# Altium PCB tmtr_board_rev1.PcbDoc
Units mil, origin at the board's own origin, x right, y up, seen from the top; angles counter-clockwise.
Board outline 1456.69 x 1811.02 mil, 2 copper layers (Top, Bottom), stack 61.811 mil thick; 40 components, 41 nets, 149 pads, 25 vias.
Unrouted connection lines stored in the file: 1.
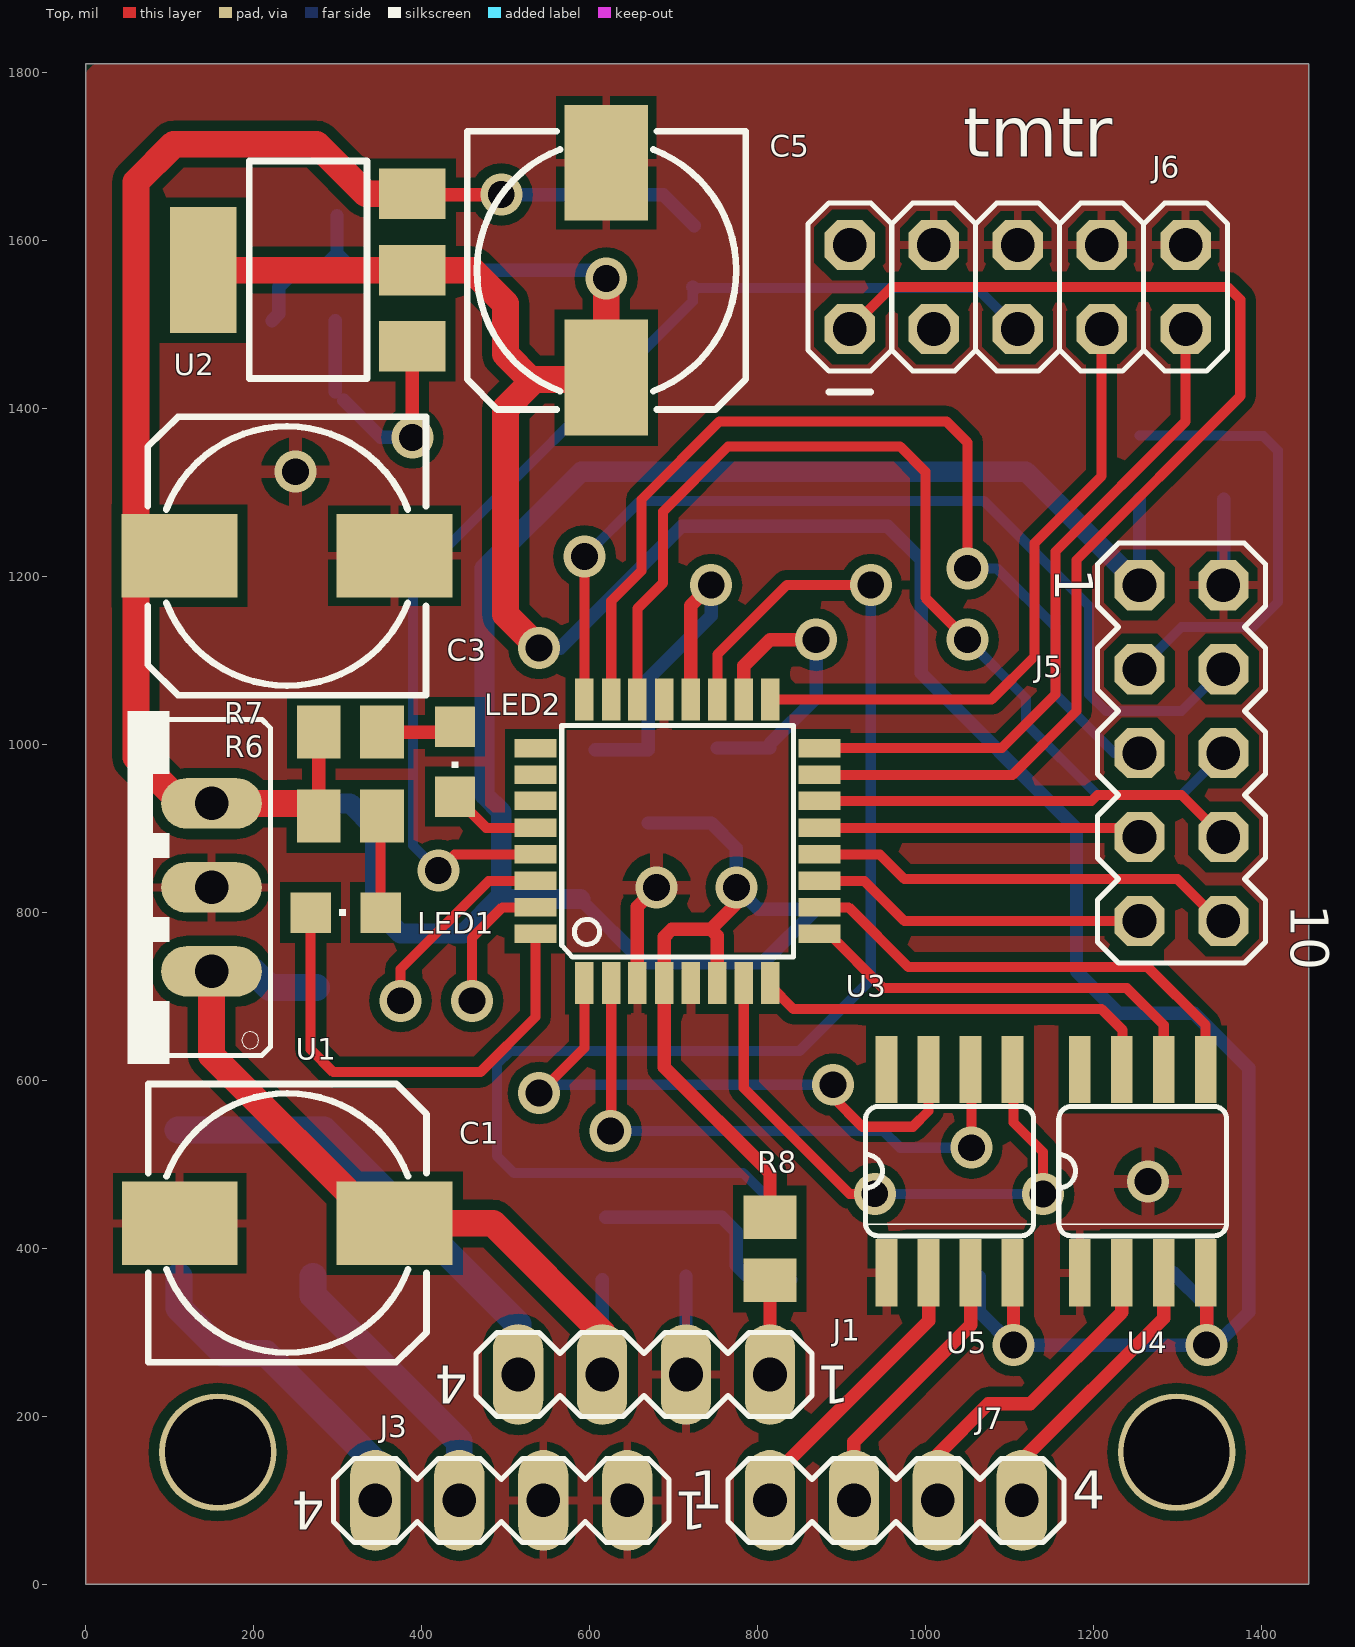
[diagram p0: Top view]
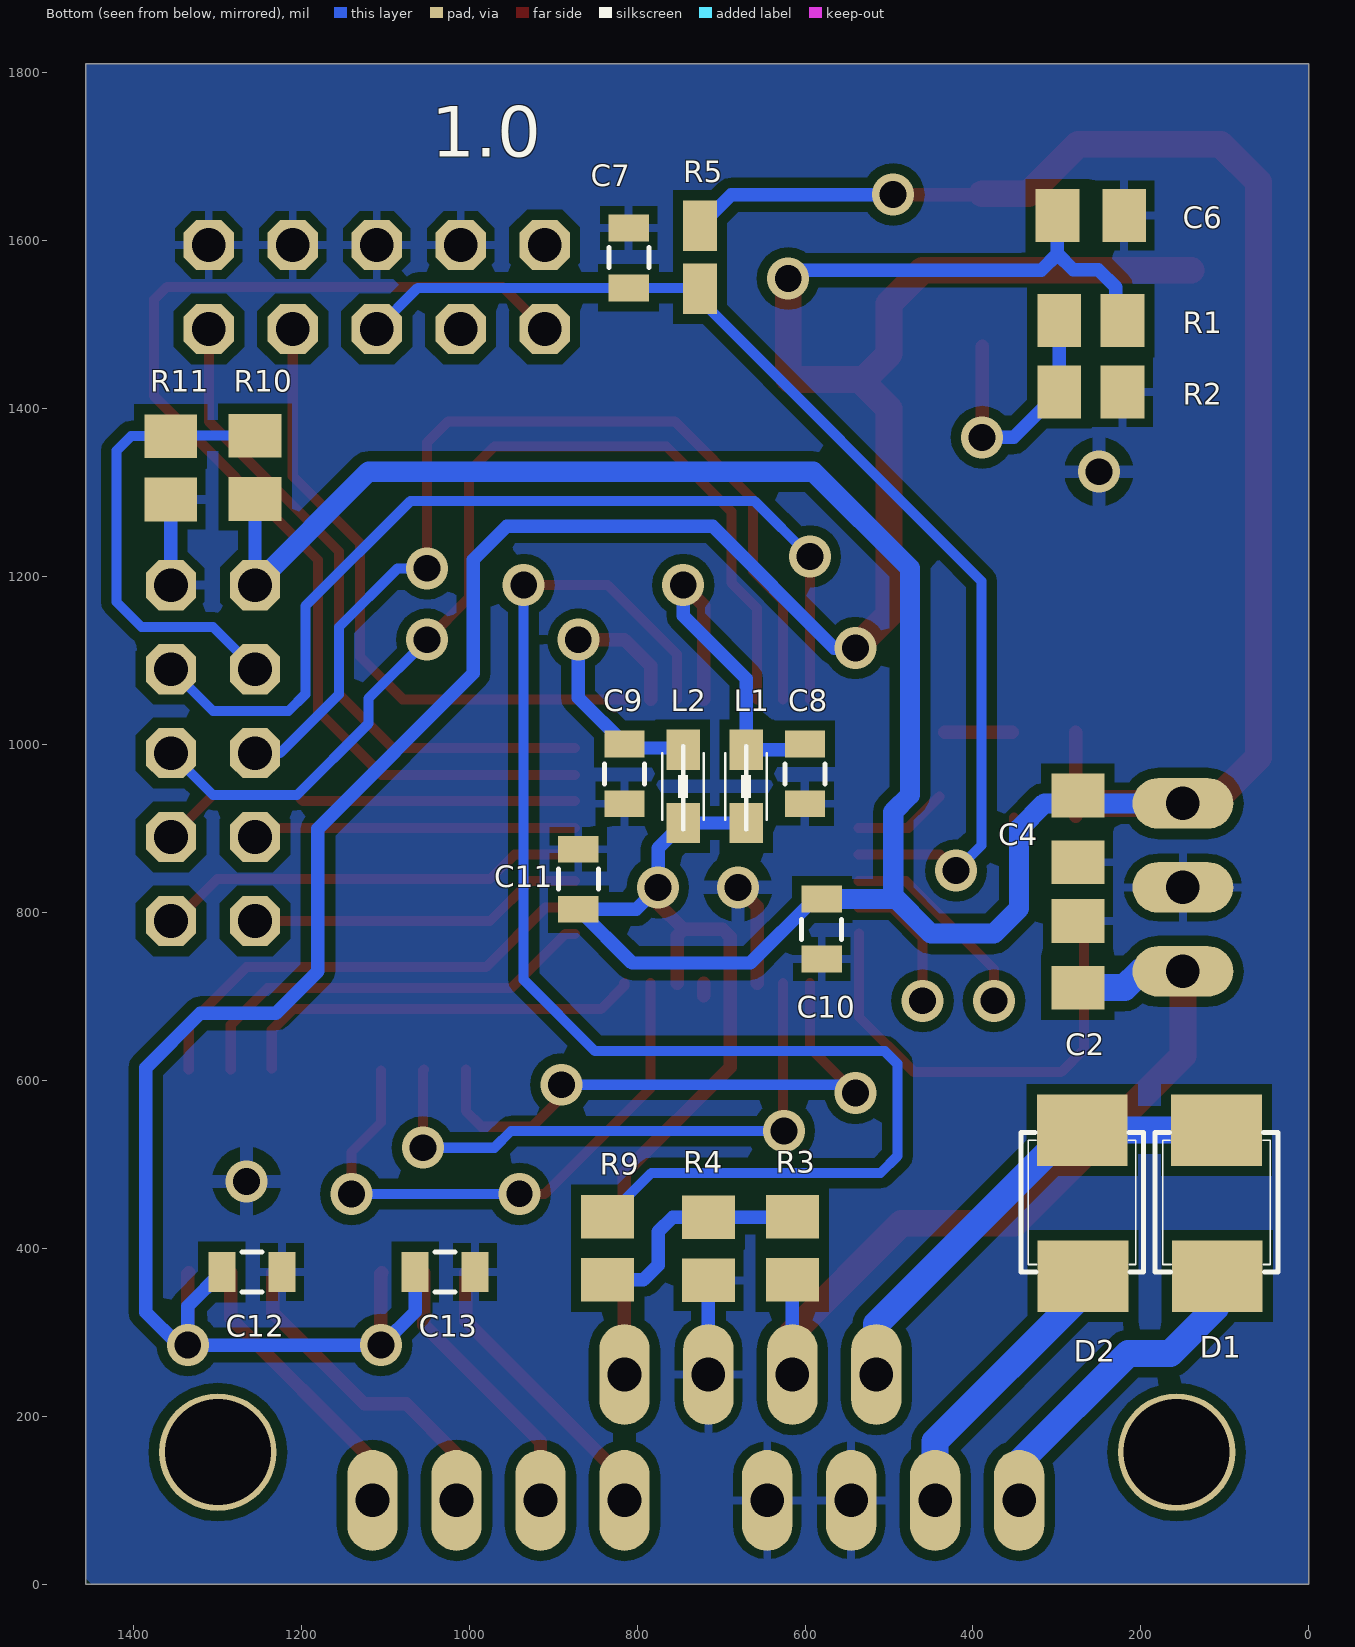
[diagram p1: Bottom view, seen from below]

## Layer stack, top to bottom
Top Solder: solder mask 0.4, Solder Resist, Dk 3.5
Top: signal copper 1.378
Dielectric 1: core 59.055, FR-4, Dk 4.8
Bottom: signal copper 1.378
Bottom Solder: solder mask 0.4, Solder Resist, Dk 3.5

## Board outline
0,0 1456.69,0 1456.69,1811.02 0,1811.02

## Design rules (kind name [scope] priority, off if disabled: settings)
Clearance mdViaVia [IsVia vs IsVia] p1: gap=12
Clearance mdPadVia [IsPad vs IsVia] p2: gap=12
Clearance mdPadPad [IsPad vs IsPad] p3: gap=12
Clearance mdWireVia [(InLayerClass('Signal Layers') AND IsTrack) vs IsVia] p4: gap=12
Clearance mdWirePad [(InLayerClass('Signal Layers') AND IsTrack) vs IsPad] p5: gap=12
Clearance mdWireWire [(InLayerClass('Signal Layers') AND IsTrack) vs (InLayerClass('Signal Layers') AND IsTrack)] p6: gap=12
Clearance [All] p7: gap=12
HoleSize [All] p1: absolutevalues=TRUE maxlimit=100000 minlimit=24 maxpercent=80.000 minpercent=20.000
HoleToHoleClearance [All] p1: gap=16 allowstackedmicrovias=TRUE
MinimumSolderMaskSliver [All] p1: minsoldermaskwidth=16
NetAntennae [All] p1: netantennaetolerance=100
PolygonConnect ThermalVias [IsVia] p1: connectstyle=Relief reliefconductorwidth=16 reliefentries=4 polygonreliefangle="90 Angle" airgapwidth=16
PolygonConnect [All] p2: connectstyle=Relief reliefconductorwidth=10 reliefentries=4 polygonreliefangle="90 Angle" airgapwidth=10
RoutingVias [All] p1: holewidth=24 width=40 viastyle="Through Hole" minholewidth=16 minwidth=32 maxholewidth=50 maxwidth=66
SilkToSilkClearance [All] p1 off: silktosilkclearance=10
SilkToSolderMaskClearance [IsPad] p1 off: minsilkscreentomaskgap=10 clearancetoexposedcopper=TRUE
SolderMaskExpansion [All] p1: expansion=8
UnpouredPolygon [All] p1: allowunpoured=FALSE
Width [All] p1: maxlimit=100000 minlimit=8 preferedwidth=24 minimp=50.000000 maximp=50.000000 favimp=50.000000
23 further rules are at their usual default settings.

## Classes and differential pairs
component class tmtr_board_rev1_2: C12 C13 J7 U4 U5
component class tmtr_board_rev1_1: C7 C8 C9 C10 C11 J1 J5 J6 L1 L2 LED1 LED2 R5 R6 R7 R8 R9 R10 R11 U3
component class tmtr_board_rev1_0: C1 C2 C3 C4 C5 C6 D1 D2 J3 R1 R2 R3 R4 U1 U2

## Components (designator, comment, footprint, x,y, rotation, side; value= is the part's Value field where it differs from the comment)
C1 "<B>POLARIZED CAPACITOR</B>, European symbol" 153CLV-0810 240,430 r0 top
C2 "<B>CAPACITOR</B>, American symbol" C0805K 275,750 r90 bottom
C3 "<B>POLARIZED CAPACITOR</B>, European symbol" 153CLV-0810 240,1225 r180 top
C4 "<B>CAPACITOR</B>, American symbol" C0805K 275,900 r270 bottom
C5 "<B>POLARIZED CAPACITOR</B>, European symbol" 153CLV-0810 620,1565 r270 top
C6 "<B>CAPACITOR</B>, American symbol" C0805K 260,1630 r180 bottom
C7 "CAP0805" 0805#1 810,1580 r270 bottom
C8 "CAP0805" 0805#1 600,965 r90 bottom
C9 "CAP0805" 0805#1 815,965 r90 bottom
C10 "CAP0805" 0805#1 580,780 r90 bottom
C11 "CAP0805" 0805#1 870,840 r270 bottom
C12 "CAP0805" 0805#1 1258.86,372.05 r180 bottom
C13 "CAP0805" 0805#1 1028.86,372.05 r180 bottom
D1 "D-FILL-SMB" SMB 105,450 r270 bottom
D2 "D-FILL-SMB" SMB 265,450 r270 bottom
J1 "<b>PIN HEADER</b>" MA04-1 665,250 r180 top
J3 "MA04-1" MA04-1 495,100 r180 top
J5 "<b>PIN HEADER</b>" MA05-2 1305,990 r270 top
J6 "AVR_SPI_PROG" AVR_ICSP 1110,1545 r90 top
J7 "<b>PIN HEADER</b>" MA04-1 965,100 r0 top
L1 "WE-CBF_0805" 0805#2 670,950 r90 bottom
L2 "WE-CBF_0805" 0805#2 745,950 r90 bottom
LED1 "LEDCHIPLED_0805" CHIPLED_0805 310,800 r90 top
LED2 "LEDCHIPLED_0805" CHIPLED_0805 440,980 r180 top
R1 "R-EU_M0805" M0805 260,1505 r180 bottom
R2 "R-EU_M0805" M0805 260,1420 r180 bottom
R3 "R-EU_M0805" M0805 615,400 r90 bottom
R4 "R-EU_M0805" M0805 715,400 r270 bottom
R5 "R-EU_R0805W" R0805W 725,1580 r90 bottom
R6 "R-EU_M0805" M0805 315,915 r0 top
R7 "R-EU_M0805" M0805 315,1015 r0 top
R8 "R-EU_M0805" M0805 815,400 r270 top
R9 "R-EU_M0805" M0805 835,400 r90 bottom
R10 "R-EU_M0805" M0805 1255,1330 r90 bottom
R11 "R-EU_M0805" M0805 1355.3,1330 r270 bottom
U1 "78XXS" 78XXS 50,830 r90 top
U2 "LD117A?*S" SOT223 265,1565 r90 top
U3 "MEGA8-AI" TQFP32-08 705,885 r90 top
U4 "MAX31855" SO08 1258.86,492.05 r0 top
U5 "MAX31855" SO08 1028.86,492.05 r0 top

## Footprints (in the part's own frame and the unit in brackets; to place one, negate y for a bottom-side part, rotate by r counter-clockwise, add the part's x,y. Pads: shape width x height; smd on the part's side, far side on the other; paste and mask are expansions set on the pad)
78XXS [mil] "78XXS"
  oval 60x120 hole 40: GND(0,-100) IN(-100,-100) OUT(100,-100)
  silkscreen extent -210,-170 210,0
153CLV-0810 [mil]
  rect 138x99 smd: +(128,0) -(-127.95,0)
  silkscreen extent -165,-165 166,166
0805#1 [mil] "0805"
  rect 32x48 smd: 1(-35.43,0) 2(36,0)
  silkscreen extent -12,-24 12,24
0805#2 [mil] "0805"
  rect 48x40 smd: 1(-43.31,0) 2(44,0)
  silkscreen extent -51,-25 48,25
AVR_ICSP [mil] "AVR_ICSP"
  oct 60x60 hole 40: 1(-50,200) 2(50,200) 3(-50,100) 4(50,100) 5(-50,0) 6(50,0) 7(-50,-100) 8(50,-100) 9(-50,-200) 10(50,-200)
  silkscreen extent -125,-250 100,250
C0805K [mil]
  rect 52x63 smd: 1(-39.37,0) 2(40,0)
CHIPLED_0805 [mil] "CHIPLED_0805"
  rect 48x48 smd: A(0,-41.34) C(0,42)
  silkscreen extent -4,0 4,8
M0805 [mil] "M0805"
  rect 52x63 smd: 1(-37.4,0) 2(38,0)
MA04-1 [mil]
  oval 60x120 hole 40: 1(-150,0) 2(-50,0) 3(50,0) 4(150,0)
  silkscreen extent -200,-50 200,50
MA05-2 [mil]
  oct 60x60 hole 40: 1(-200,-50) 2(-200,50) 3(-100,-50) 4(-100,50) 5(0,-50) 6(0,50) 7(100,-50) 8(100,50) 9(200,-50) 10(200,50)
  silkscreen extent -250,-100 250,100
R0805W [mil] "R0805W"
  rect 60x40 smd: 1(-37.01,0) 2(38,0)
SMB [mil] "SMB"
  rect 85x108 smd: 1(-91,-5) 2(83,-4)
  silkscreen extent -88,-78 78,68
SO08 [mil] "SO08"
  rect 26x80 smd: 1(-75,-121) 2(-25,-121) 3(25,-121) 4(75,-121) 5(75,121) 6(25,121) 7(-25,121) 8(-75,121)
  silkscreen extent -100,-77 100,77
SOT223 [mil] "SOT223"
  rect 60x79 smd: 1(-90.55,-124.02) 2(0,-124.02) 3(91,-124.02)
  rect 150x79 smd: 4(0,125)
  silkscreen extent -129,-70 130,70
TQFP32-08 [mil] "TQFP32-08"
  rect 50x22 smd: 1(-169,111) 2(-169,79) 3(-169,48) 4(-169,16) 5(-169,-15.75) 6(-169,-47.24) 7(-169,-78.74) 8(-169,-110.24) 17(169,-110.24) 18(169,-78.74) 19(169,-47.24) 20(169,-15.75) 21(169,16) 22(169,48) 23(169,79) 24(169,111)
  rect 22x50 smd: 9(-110.24,-169) 10(-78.74,-169) 11(-47.24,-169) 12(-15.75,-169) 13(16,-169) 14(48,-169) 15(79,-169) 16(111,-169) 25(111,169) 26(79,169) 27(48,169) 28(16,169) 29(-15.75,169) 30(-47.24,169) 31(-78.74,169) 32(-110.24,169)
  silkscreen extent -138,-138 138,138

## Part data
C1 C3 C5: library part CPOL-EU153CLV-0810
C2 C4 C6: library part C-USC0805K
C7 C8 C9 C10 C11 C12 C13: "<b>Capacitor</b> / Standard 0603 ceramic capacitor, and 0.1\" leaded capacitor."
D1 D2: "<B>DIODE</B><p> / filled"
J1 J7: library part MA04-1
J3: "<b>PIN HEADER</b>"
J5: library part MA05-2
J6: "<b>AVR ICSP Header</b>  / This is the standard AVR In Circuit Serial Programming header. Minimal, but includes pin one indicator. Works with standard Olimex programmers. Also look for the 6-pin reduced version."
L1 L2: "SMD EMI Suppression Ferrite Beads /  / - excellent anti-EMI properties  / - low DCR / - impedances till 3000 ohms / - rated current up to 6 A"
LED1 LED2: "<b>LED</b><p> / <u>OSRAM</u>:<br> /  / - <u>CHIPLED</u><br> / LG R971, LG N971, LY N971, LG Q971, LY Q971, LO R971, LY R971 / LH N974, LH R974<br> / LS Q976, LO Q976, LY Q976<br> / LO Q996<br> /  / - <u>Hyper CHIPLED</u><br> / LW Q18S<br> / LB Q993, LB Q99A, LB R99A<br> /  / - <u>SideLED</u><br> / LS A670, LO A670, LY A670, LG A670, LP A670<br> / LB A673, LV A673, LT A673, LW A673<br> / LH A674<br> / LY A675<br> / LS A676, LA A676, LO A676, LY A676, LW A676<br> / LS A679, LY A679, LG A679<br> /  / -  <u>Hyper Micro SIDELED®</u><br> / LS Y876, LA Y876, LO Y876, LY Y876<br> / LT Y87S<br> /  / - <u>SmartLED</u><br> / LW L88C, LW L88S<br> / LB L89C, LB L89S, LG L890<br> / LS L89K, LO L89K, LY L89K<br> / LS L896, LA L896, LO L896, LY L896<br> /  / - <u>TOPLED</u><br> / LS T670, LO T670, LY T670, LG T670, LP T670<br> / LSG T670, LSP T670, LSY T670, LOP T670, LYG T670<br> / LG T671, LOG T671, LSG T671<br> / LB T673, LV T673, LT T673, LW T673<br> / LH T674<br> / LS T676, LA T676, LO T676, LY T676, LB T676, LH T676, LSB T676, LW T676<br> / LB T67C, LV T67C, LT T67C, LS T67K, LO T67K, LY T67K, LW E67C<br> / LS E67B, LA E67B, LO E67B, LY E67B, LB E67C, LV E67C, LT E67C<br> / LW T67C<br> / LS T679, LY T679, LG T679<br> / LS T770, LO T770, LY T770, LG T770, LP T770<br> / LB T773, LV T773, LT T773, LW T773<br> / LH T774<br> / LS E675, LA E675, LY E675, LS T675<br> / LS T776, LA T776, LO T776, LY T776, LB T776<br> / LHGB T686<br> / LT T68C, LB T68C<br> /  / - <u>Hyper Mini TOPLED®</u><br> / LB M676<br> /  / - <u>Mini TOPLED Santana®</u><br> / LG M470<br> / LS M47K, LO M47K, LY M47K / <p> / Source: http://www.osram.convergy.de<p> /  / <u>LUXEON:</u><br> / - <u>LUMILED®</u><br> / LXK2-PW12-R00, LXK2-PW12-S00, LXK2-PW14-U00, LXK2-PW14-V00<br> / LXK2-PM12-R00, LXK2-PM12-S00, LXK2-PM14-U00<br> / LXK2-PE12-Q00, LXK2-PE12-R00, LXK2-PE12-S00, LXK2-PE14-T00, LXK2-PE14-U00<br> / LXK2-PB12-K00, LXK2-PB12-L00, LXK2-PB12-M00, LXK2-PB14-N00, LXK2-PB14-P00, LXK2-PB14-Q00<br> / LXK2-PR12-L00, LXK2-PR12-M00, LXK2-PR14-Q00, LXK2-PR14-R00<br> / LXK2-PD12-Q00, LXK2-PD12-R00, LXK2-PD12-S00<br> / LXK2-PH12-R00, LXK2-PH12-S00<br> / LXK2-PL12-P00, LXK2-PL12-Q00, LXK2-PL12-R00 / <p> / Source: www.luxeon.com<p> /  / <u>KINGBRIGHT:</U><p> / KA-3528ASYC<br> / Source: www.kingbright.com"
R1 R2 R3 R4 R5 R6 R7 R8 R9 R10 R11: "<B>RESISTOR</B>, European symbol"
U1: "<b>VOLTAGE REGULATOR</b>"
U2: "<b>Low drop fixed and adjustable positive voltage regulators</b> 1 A<p> / Source: http://www.st.com/stonline/products/literature/ds/7194/ld1117axx.pdf"
U3: "<b>MICROCONTROLLER</b><p> / 8 Kbytes FLASH, 1 kbytes SRAM, 512 bytes EEPROM, USART, 6-channel 10 bit ADC, 2-channel 8 bit ADC<br> / Pin compatible with Atmega48, ATMega88, ATMega168<br> / Source: avr.lbr"
U4 U5: library part MAX6675

## Free pads (board coordinates)
  round 140 hole 126 mask+16: 1(1299.21,157.48)
  round 140 hole 126 mask+8: 2(157.48,157.48)

## Via types
v1: diameter 50, hole 32, Top to Bottom, 24 vias
v2: diameter 50, hole 31.5, Top to Bottom, 1 vias

## Nets (pads, with @x,y where several pads share a name; then routed paths per layer and width w, separated by ;. In a path a pad name is that pad's centre, name@x,y a point inside that pad or via, vN(x,y) a via of type N, cw(c..) or ccw(c..) an arc to the next point about the centre after c; other vN are vias at no path point)
3.3V: C5.+ C6.1 C12.1 C13.1 R1.2 U2.2 U2.4 U4.4 U5.4 | length 3858.3
  Top w16: U5.4 1105,369.91 v1(1105,285) ; U4.4 1335,369.91 v1(1335,285)
  Top w32: U2.4 U2.2 460,1565 500,1525 500,1465 530,1435 ; v1(540,1115) 500,1155 500,1400 530,1430 530,1435 ; v1(620,1555) C5.+ 618,1435 530,1435
  Bottom w16: R1.2 230,1513 230,1545 250.63,1565.63 280.63,1565.63 299.37,1584.37 ; C6.1 299.37,1584.37 ; v1(540,1115) 565,1115 710,1260 955,1260 995,1220 995,1085 1180,900 1180,730 1230,680 1320,680 1385,615 1385,324.1 1345.9,285 1103.86,285 1064.3,324.57 C13.1@1064.3,366.62 ; v1(620,1555) 610,1565 318.74,1565 299.37,1584.37 ; C12.1 1335,331.34 v1(1335,285)
5V: C3.+ C4.1 C10.2 C11.2 J5.1 L1.1 L2.1 R5.2 R6.1 R7.1 R8.1 R10.1 U1.OUT U2.3 U3.4 U3.6 | length 4878.3
  Top w15.98: 744.49,780 775,810.51 v1(775,830)
  Top w16: R6.1 R7.1 ; U2.3@390.02,1655 v1(495,1655) ; U3.6 752.24,772.24 744.49,780 698,780 689,771 U3.4 689,616 815,490 R8.1
  Top w32: R6.1@262.4,930 U1.OUT 115,930 60,985 60,1670 105,1715 275,1715 334,1656 U2.3
  Bottom w15.98: L2.1 775,876.69 v1(775,830) 801,804 C11.2
  Bottom w16: v1(495,1655) 688,1655 R5.2 ; C10.2@589,816 665,740 806,740 C11.2 ; L1.1 L2.1 ; J5.1 R10.1
  Bottom w24: U1.OUT 315,930 345,900 345,805 375,775 450,775 495,820 495,920 475,940 475,1210 590,1325 1120,1325 J5.1 ; 495,816 C10.2 C10.2@589,816
CS_TS_IC0: U3.9 U4.6 | length 507.9
  Top w12: U3.9 885.24,774.76 950,710 1240,710 1283.86,666.14 U4.6
CS_TS_IC1: U3.2 U5.6 | length 706.8
  Top w12: v1@626,541 U3.2 ; U5.6 1055,611.91 v1(1055,520)
  Bottom w12: v1(625,540) 950,540 970,520 v1(1055,520)
DB4: J5.9 U3.11 | length 400.8
  Top w12: U3.11 927.24,837.76 975,790 J5.9
DB5: J5.10 U3.12 | length 513.8
  Top w12: U3.12 945.75,869.25 975,840 1300,840 1350,790 J5.10
DB6: J5.7 U3.13 | length 385.6
  Top w12: U3.13 1244,901 J5.7
DB7: J5.8 U3.14 | length 504.6
  Top w12: U3.14 1198,933 1205,940 1305,940 J5.8
DO_TS_IC0: U3.8 U4.7 | length 490.7
  Top w12: U3.8 815.24,712.79 843.02,685 1210,685 1235,660 U4.7@1235,614.19
DO_TS_IC1: U3.1 U5.7 | length 707.9
  Top w12: v1(540,585) 594,639 U3.1 ; v1(890,595) 890,580 925,545 985,545 1003.86,563.86 U5.7
  Bottom w12: v1(540,585) 550,595 v1(890,595)
EN: J5.5 U3.23 | length 1182.8
  Top w12: U3.23 626,1171 662,1207 662,1292 755,1385 1025,1385 1050,1360 v1(1050,1210)
  Bottom w12: v1(1050,1210) 1085,1210 1155,1140 1155,1060 1225,990 J5.5
GND: C1.- C2.2 C3.- C4.2 C5.- C6.2 C7.1 C8.1 C9.1 C10.1 C11.1 C12.2 C13.2 J1.2 J3.1 J3.2 J5.2 J6.4 J6.6 J6.8 J6.10 R2.2 R4.2 R11.2 U1.GND U3.3 U3.5 U3.21 U4.1 U5.1 | length 356.9
  Top w16: U3.3 657,807 v1(680,830) ; U3.5@720.75,701 U3.5
  Bottom w16: J1.2 R4.2@715,366.7 ; J5.2@1355.3,1190.3 R11.2
  other v1: 1265,480 250,1325
LED1: LED2.C U3.28 | length 111.3
  Top w12: LED2.C 477,901 U3.28
LED2: LED1.C U3.32 | length 568.4
  Top w12: LED1.C 268,637 295,610 470,610 535.76,675.76 U3.32@535.76,775
NetC8_2: C8.2 L1.2 U3.20 | length 436.1
  Top w16: U3.20 720.75,1165.75 v1(745,1190)
  Bottom w16: C8.2@607,994 L1.2 670,1078.5 745,1153.5 v1(745,1190)
NetC9_2: C9.2 L2.2 U3.18 | length 348.7
  Top w16: U3.18 783.74,1093.74 815,1125 v1(870,1125)
  Bottom w15.98: L2.2@752,996 C9.2@815,996 ; C9.2 870,1056 870,1070
  Bottom w16: 870,1070 v1(870,1125)
NetD1_2: D1.2 J3.4 | length 393.2
  Bottom w32: D1.2@111,367 111,329 165,275 215,275 345,145 J3.4
NetD2_2: D2.2 J3.3 | length 339.1
  Bottom w32: D2.2@271,367 271,344 445,170 J3.3
NetJ1_1: J1.1 R8.2 | length 112
  Top w16: J1.1 R8.2
NetJ5_3: J5.3 R10.2 R11.1 | length 549.7
  Bottom w12: J5.3 1305,1140 1390,1140 1420,1170 1420,1350 1402.6,1367.4 R11.1 ; R10.2 R11.1@1354.7,1368
NetLED1_A: LED1.A R6.2 | length 113.3
  Top w12: LED1.A R6.2@351.34,913.34
NetLED2_A: LED2.A R7.2 | length 80.7
  Top w16: R7.2 LED2.A@433.66,1015
NetR1_1: R1.1 R2.1 U2.1 | length 293.3
  Top w16: v1(389.02,1365.98) U2.1
  Bottom w16: R2.1 R1.1 ; R2.1@307.4,1410 351.42,1365.98 v1(389.02,1365.98)
NetR9_2: R9.2 U3.19 | length 1711.5
  Top w12: U3.19 752.24,1107.24 835,1190 v1(935,1190)
  Bottom w12: R9.2 783,490 510,490 490,510 490,620 505,635 850,635 935,720 v1(935,1190)
R/W: J5.6 U3.22 | length 1233.8
  Top w12: U3.22 657,1162 687.75,1192.75 687.75,1277.75 765,1355 970,1355 1000,1325 1000,1175 v1(1050,1125)
  Bottom w12: v1(1050,1125) 1120,1055 1120,1025 1205,940 1305,940 J5.6
RS: J5.4 U3.24 | length 1144.1
  Top w12: U3.24 v1(594,1224)
  Bottom w12: v1(594,1224) 660,1290 1070,1290 1195,1165 1195,1060 1215,1040 1305,1040 J5.4
RXD: U3.30 | length 242.2
  Top w12: v1(375,695) 375,732.76 480,837.76 U3.30
SCK_TS_IC0: U3.10 U4.5 | length 571
  Top w12: U3.10 908.74,806.26 980,735 1265,735 1333.86,666.14 U4.5
SCK_TS_IC1: U3.7 U5.5 | length 694.7
  Top w12: U3.7 783.74,591.26 910,465 v2(940,465) ; U5.5@1105,611.91 1105,550 1140,515 v1(1140,465)
  Bottom w12: v2(940,465) v1(1140,465)
T+0: J7.4 U4.3 | length 341
  Top w16: J7.4 1115,148.19 1283.86,317.05 U4.3
T+1: J7.2 U5.3 | length 328.6
  Top w16: J7.2 915,170 1053.86,308.86 U5.3
T-0: J7.3 U4.2 | length 391
  Top w16: J7.3 1015,155 1075,215 1125,215 1233.86,323.86 U4.2
T-1: J7.1 U5.2 | length 349.3
  Top w16: J7.1 815,125 1003.86,313.86 U5.2
TXD: U3.31 | length 166
  Top w12: v1(460,695) 460,770 496.26,806.26 U3.31
UC-MISO: J6.9 U3.16 | length 806.7
  Top w12: U3.16 1091,996 1155,1060 1155,1230 1310,1385 J6.9
UC-MOSI: J6.1 U3.15 | length 1400.2
  Top w12: U3.15 1104,964 1180,1040 1180,1220 1375,1415 1375,1530 1360,1545 960,1545 J6.1
UC-RST: C7.2 J6.5 R5.1 U3.29 | length 1376.5
  Top w12.01: v1(420,850) 439.25,869.25 U3.29
  Bottom w12: v1(420,850) 390,880 390,1195 722.99,1527.99 R5.1@722.99,1545 ; R5.1@726.01,1544 C7.2 1061,1544 J6.5
  Bottom w16: R5.1@722.99,1545 R5.1
UC-SCK: J6.7 U3.17 | length 759
  Top w12: U3.17 1079,1054 1130,1105 1130,1240 1210,1320 J6.7
V_SWITCH: D1.1 D2.1 J1.4 | length 560.7
  Bottom w32: D1.1 D2.1 284,541 515,310 J1.4
VIN: C1.+ C2.1 J1.3 R3.1 U1.IN | length 997.3
  Top w32: U1.IN 150,630 350,430 C1.+ 485,430 615,300 J1.3
  Bottom w16: J1.3 R3.1
  Bottom w32: U1.IN 200,730 219.37,710.63 C2.1
VIN_SENSE: R3.2 R4.1 R9.1 | length 275
  Bottom w16: R3.2@619.4,437.4 R4.1 757.6,437.4 775,420 775,380 792.4,362.6 R9.1@840,362.6
pads on no net: J6.2 J6.3 U3.25 U3.26 U3.27 U4.8 U5.8

## Polygon pours and split planes (outlines as drawn)
GND on Bottom "Bot GND" (solid, pour order 5): 0,0 1456.69,0 1456.69,1811.02 728.35,1811.02 0,1811.02
GND on Top "Top GND" (solid, pour order 7): 0,0 1456.69,0 1456.69,1811.02 0,1811.02

## Silkscreen, mask and mechanical layers (free items; w line width, h text height)
Top Overlay:
  text "tmtr" at 1045,1700 h60
Bottom Overlay:
  text "1.0" at 1045,1700 h60
Dimension:
  lines w10: 0,0 1460,0 1460,1815 1455,1810 0,1810 0,0
Unrouted:
  lines w0: 105,596 205,596 442,790 281,939 156,1213 ; 150,830 334,794 ; 150,930 394,953 ; 151,1304 672,1319 ; 165,479 190,830 ; 190,730 265,479 481,464 696,674 ; 305,596 405,596 719,604 ; 375,852 399,1450 ; 375,952 682,1271 617,1609 ; 409,1049 618,1051 608,1154 ; 434,953 474,794 ; 434,1053 374,794 481,664 668,812 ; 449,2285 1161,2357 ; 472,1198 850,325 ; 567,940 711,1089 ; 608,759 843,673 ; 608,830 693,673 968,840 1048,686 ; 648,1147 676,1009 ; 659,1546 1078,1295 ; 667,2444 665,2763 900,2869 1000,2869 1100,2869 1200,2869 1329,2479 ; 710,1263 718,778 750,325 ; 734,1546 817,1823 ; 765,2763 767,2444 722,2209 1078,1224 ; 892,1823 1171,1888 ; 900,2969 1049,1947 ; 926.86,645.05 1051.86,741.05 1281.86,658.05 ; 1000,2969 1108,1888 ; 1013,912 1187,1607 1243,1607 1381,1694 ; 1013,987 1387,2104 ; 1049,1978 1300,2969 ; 1049,2010 1313,1380 ; 1049,2041 1263,1380 ; 1049,2073 1213,1380 ; 1049,2104 1609,2326 ; 1049,2136 1609,2226 ; 1049,2167 1609,2126 ; 1086,1599 1303,1598 1234,1888 ; 1086,1670 1187,1693 1202,1888 ; 1100,2969 1387,2073 1597,1873 1608,1799 ; 1125,670 1163,1138 ; 1139,1888 1243,1693 1303,1669 ; 1161,2428 1256,2428 ; 1202,2226 1265,2226 1256,2428 ; 1213,1138 1265,665 ; 1263,1138 1365,665 ; 1297,2226 1709,2326 ; 1328,1888 1470,1702 ; 1328,2226 1709,2426 ; 1381,1619 1470,1619 ; 1387,1947 1594,1720 ; 1387,1978 1568,1393 ; 1387,2010 1618,1393 ; 1387,2041 1668,1393 ; 1387,2136 1709,2226 ; 1387,2167 1709,2526 ; 1412,2585 1403,2479 1709,2126 ; 1438,1305 1679,1799 ; 1515,675 1568,1151 ; 1609,2426 1329,2479 ; 1609,2526 1338,2585 1256,2357 1161,2357 ; 1615,675 1618,1151 ; 1669,1638 1677,1720 ; 1671,1873 1595,1638 1381,1694 ; 1161,2357 1171,2226 1234,2226 1381,1694 ; 1256,2428 1329,2479

## Text inside footprints (layer, text, board x,y; h text height)
J1: Top Overlay "4" at 455,275 h77.5 r180; Top Overlay "1" at 910,275 h77.5 r180
J3: Top Overlay "1" at 740,125 h77.5 r180; Top Overlay "4" at 285,125 h77.5 r180
J5: Top Overlay "10" at 1420,810 h77.5 r270; Top Overlay "1" at 1140,1210 h77.5 r270
J7: Top Overlay "4" at 1175,75 h77.5; Top Overlay "1" at 720,75 h77.5
U1: tDocu "-" at 200,805 h77.5 r90; tDocu "I" at 200,705 h77.5 r90; tDocu "O" at 200,905 h77.5 r90
U2: Document "direction of pcb" at 249,1581 h15.5 r90; Document "transportation for" at 266.97,1581 h15.5 r90; Document "wavesoldering" at 284.68,1581 h15.5 r90